# Altium PCB 24V_Drop_Regulator.PcbDoc
Units mm, origin at the board's own origin, x right, y up, seen from the top; angles counter-clockwise.
Board outline 43 x 20 mm, 2 copper layers (Top Layer, Bottom Layer); 14 components, 6 nets, 30 pads, 5 vias.
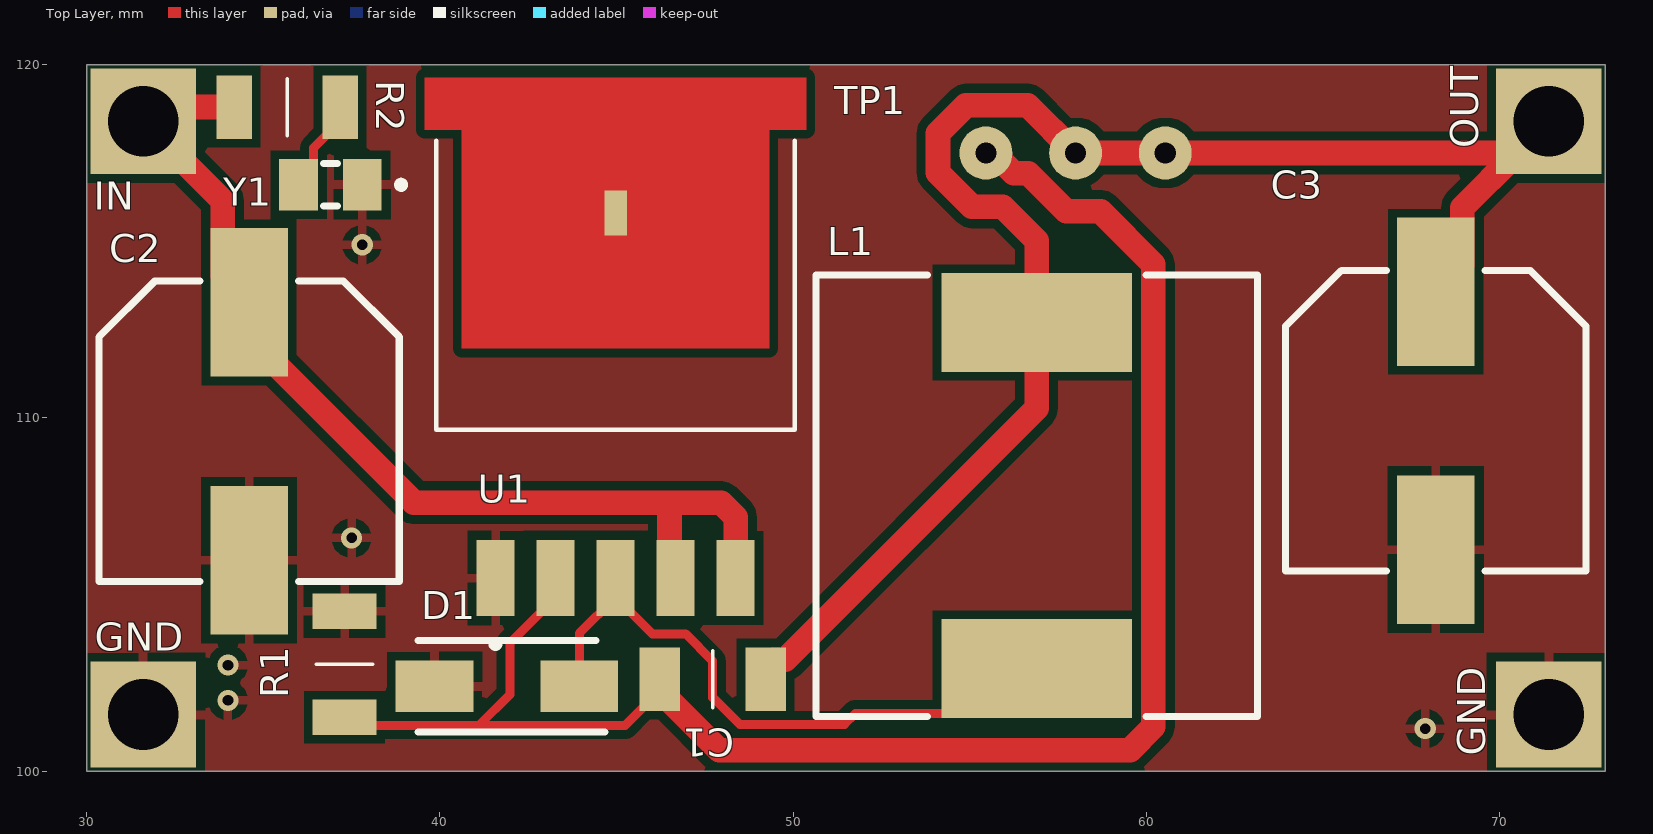
[diagram p0: Top Layer view]
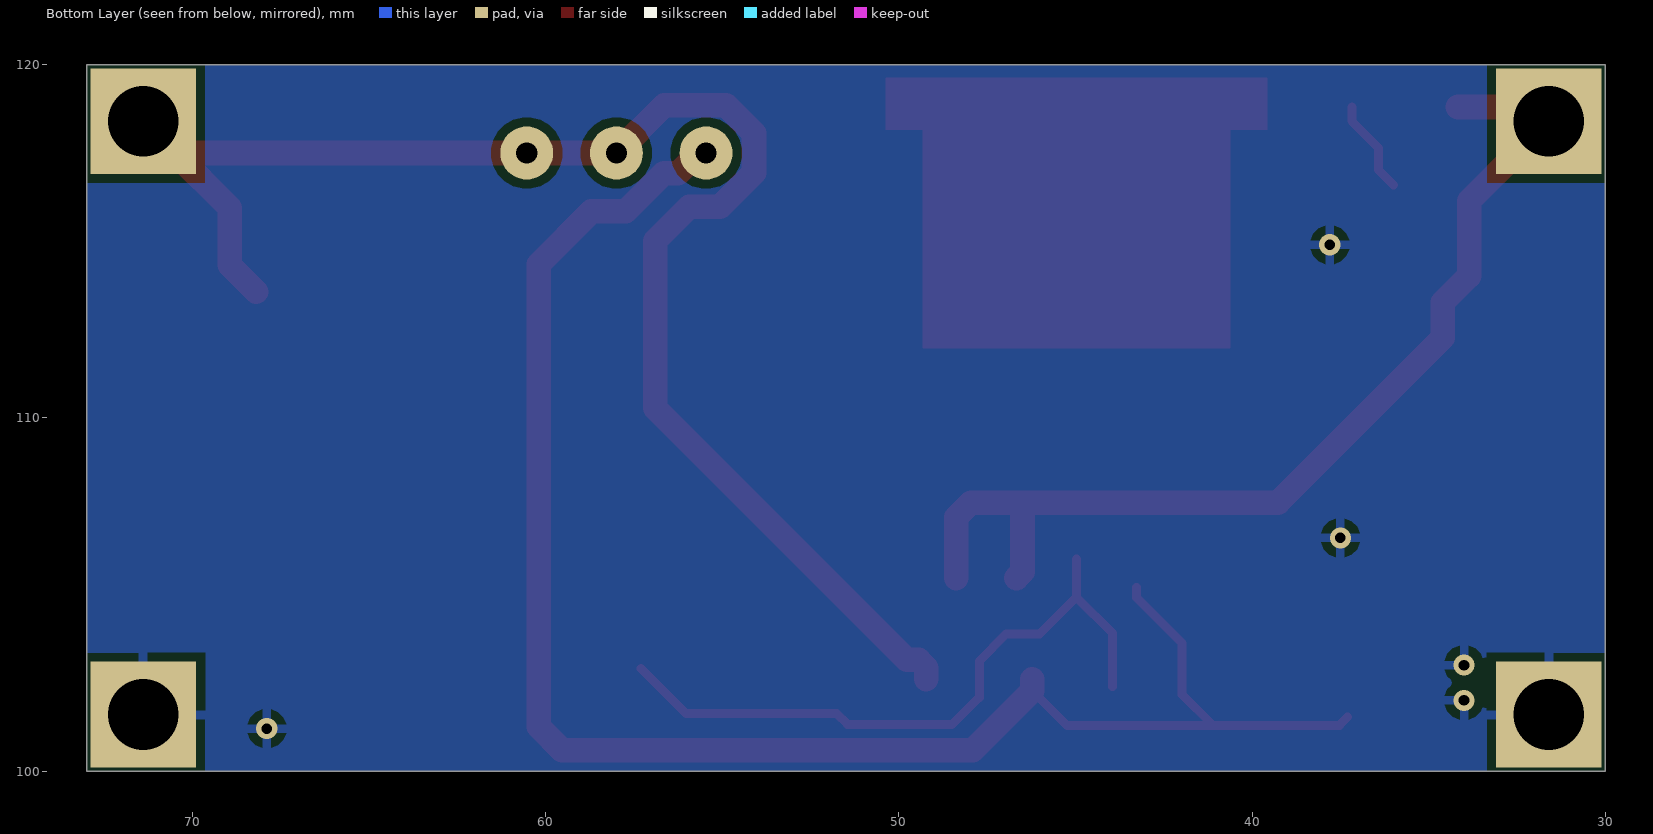
[diagram p1: Bottom Layer view, seen from below]
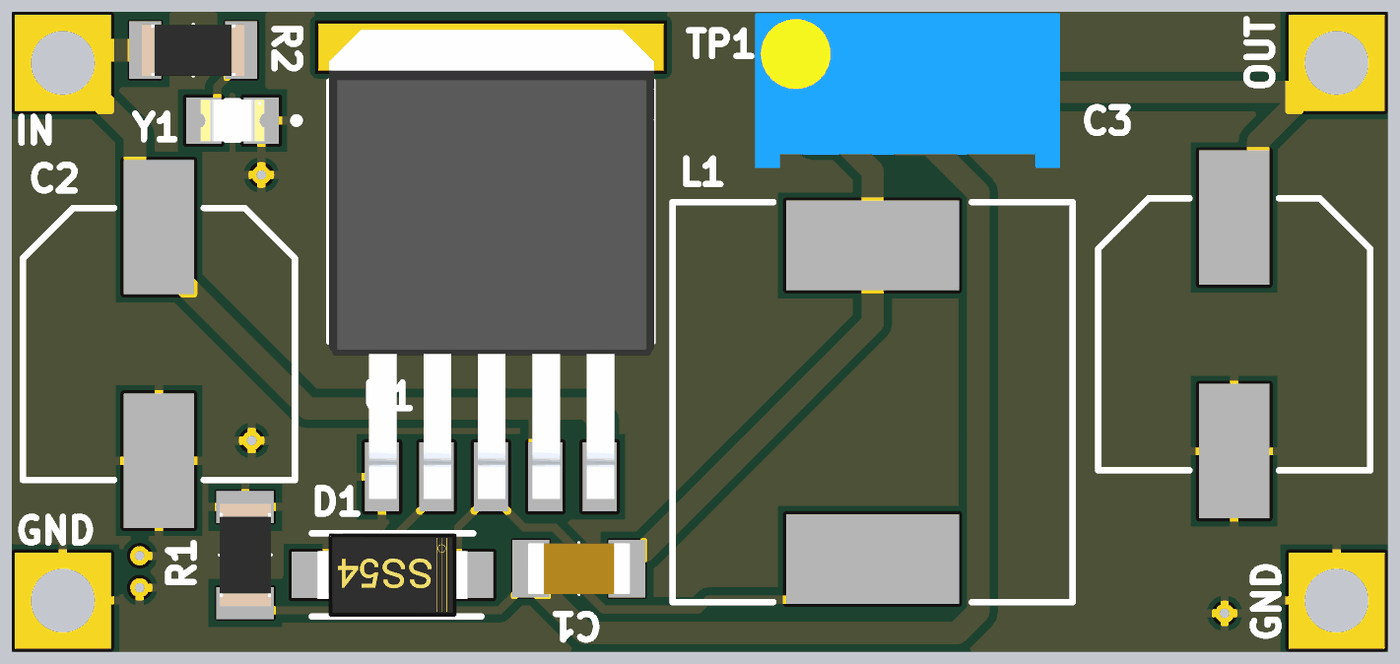
[diagram p2: 3D render of the assembled board from above, using the file's embedded part models]

## Layer stack, top to bottom
Top Solder: solder mask 0.0102, Solder Resist, Dk 3.5
Top Layer: signal copper 0.0356
Dielectric 1: dielectric 0.32, FR-4, Dk 4.8
Bottom Layer: signal copper 0.0356
Bottom Solder: solder mask 0.0102, Solder Resist, Dk 3.5

## Board outline
30,100 73,100 73,120 30,120

## Design rules (kind name [scope] priority, off if disabled: settings)
Clearance [All] p1: gap=0.254 ignorepadtopadclearanceinfootprint=FALSE except(0: Arc-Hole Track-Hole SMDPad-Hole THPad-Hole Via-Hole Fill-Hole Poly-Hole Region-Hole Text-Hole)
PolygonConnect [All] p1: connectstyle=Relief reliefconductorwidth=0.254 reliefentries=4 polygonreliefangle="90 Angle" airgapwidth=0.254
RoutingVias [All] p1: holewidth=0.3 width=0.6 viastyle="Through Hole" minholewidth=0.2 minwidth=0.2 maxholewidth=0.9 maxwidth=1.27
SolderMaskExpansion [All] p1: expansion=0.102 istentingtop=FALSE
Width [All] p1: maxlimit=1 minlimit=0.254 preferedwidth=0.254 minimp=50.000000 maximp=50.000000 favimp=50.000000
30 further rules are at their usual default settings.

## Classes and differential pairs
component class XL4005: C1 C2 C3 D1 GND IN L1 OUT R1 R2 TP1 U1 Y1

## Components (designator, comment, footprint, x,y, rotation, side; value= is the part's Value field where it differs from the comment)
C1 "33nF Capacitor" C1206 47.7,102.6 r0 top
C2 "470uF 50V Capacitor" "470uF 50V Capacitor" 34.6,109.8 r270 top
C3 "470uF 50V Capacitor" "470uF 50V Capacitor" 68.2,110.1 r270 top
D1 "SS54 Diode" SS54 41.9,102.4 r180 top
GND "GND PAD" "Edge Pads" 71.4,101.6 r0 top
GND "GND PAD" "Edge Pads" 31.6,101.6 r0 top
IN "INPUT PAD" "Edge Pads" 31.6,118.4 r0 top
L1 "33mH Inductor" "33mH 5A Inductor SMD" 56.9,107.8 r90 top
OUT "OUTPUT PAD" "Edge Pads" 71.4,118.4 r0 top
R1 "0.36k Resistor" "1206 Resistor" 37.4,103.1 r270 top
R2 "0.36k Resistor" "1206 Resistor" 35.6,118.9 r0 top
TP1 "Trimpot Potentiometer 10k" "Trimmer Potentiometer 3296" 55.46,117.5 r0 top
U1 "XL4005 IC" XL4005 45,115.6 r90 top
Y1 "0805 Led" "0805 Led" 36.9,116.6 r180 top

## Footprints (in the part's own frame and the unit in brackets; to place one, negate y for a bottom-side part, rotate by r counter-clockwise, add the part's x,y. Pads: shape width x height; smd on the part's side, far side on the other; paste and mask are expansions set on the pad)
"33mH 5A Inductor SMD" [mm]
  rect 2.8x5.4 smd: 1(-4.9,0) 2(4.9,0)
  silkscreen extent -6.25,-6.25 6.25,6.25, body extent -6.25,-6.25 6.25,6.25, height 8
"470uF 50V Capacitor" [mm]
  rect 4.2x2.2 smd: 1(-3.47,0) 2(3.83,0)
  silkscreen extent -4.07,-4.25 4.43,4.25, body extent -4.07,-4.25 4.43,4.25, height 10.5
"0805 Led" [mm]
  rect 1.1x1.45 smd: A(0.9,0) C(-0.9,0)
  silkscreen extent -2.1,-0.6 0.2,0.6, body extent -1,-0.65 1,0.65, height 0.9
"1206 Resistor" [mm]
  rect 1x1.8 smd mask+0.05: 1(-1.425,-0.1) 2(1.575,-0.1)
  silkscreen extent 0.08,-0.9 0.08,0.71, body extent -1.52,-0.9 1.68,0.71, height 0.55
C1206 [mm] "33nF Capacitor"
  rect 1.15x1.8 smd mask+0.05: 1(-1.475,0) 2(1.525,0)
  silkscreen extent 0.03,-0.8 0.03,0.81, body extent -1.57,-0.8 1.63,0.8, height 1
"Edge Pads" [mm]
  rect 3x3 hole 2: 1(0,0)
SS54 [mm] "Schottky Diode"
  rect 2.2x1.45 smd: 1(-2.05,0) 2(2.05,0)
  silkscreen extent -2.78,-1.3 2.52,1.3, body extent -2.35,-1.3 2.35,1.3, height 2
"Trimmer Potentiometer 3296" [mm] "10k"
  round 1.5 hole 0.6: 1(0,0) 2(2.54,0) 2(2.54,0) 3(5.08,0)
  body extent -2.23,-2.38 7.3,2.45, height 11.55
XL4005 [mm]
  rect 2.16x1.07 smd: 1(-10.135,3.425) 2(-10.135,1.725) 3(-10.135,0.025) 4(-10.135,-1.675) 5(-10.135,-3.375)
  rect 1.27x0.635 smd paste-2 mask+0: 3.1(0.2,0.025)
  Top Layer region: 4.035,-5.375 2.565,-5.375 2.565,-4.325 -3.635,-4.325 -3.635,4.375 2.565,4.375 2.565,5.425 4.035,5.425
  silkscreen extent -12.1,-5.05 2.25,5.11, body extent -10.82,-5.08 3.84,5.08, height 4.83

## Via types
v1: diameter 0.6, hole 0.3, Top Layer to Bottom Layer, 5 vias

## Nets (pads, with @x,y where several pads share a name; then routed paths per layer and width w, separated by ;. In a path a pad name is that pad's centre, name@x,y a point inside that pad or via, vN(x,y) a via of type N, cw(c..) or ccw(c..) an arc to the next point about the centre after c; other vN are vias at no path point)
GND: C2.2 C3.2 D1.2 GND.1 R1.1 U1.1 Y1.C
  other v1: 67.9,101.2 34,102 34,103 37.5,106.6 37.8,114.9
NetC1_1: C1.1 R1.2 TP1.1 U1.2 | length 48.6
  Top Layer w0.254: R1.2 37.531,101.294 41.108,101.294 ; U1.2@43.275,105.192 43.275,104.92 41.987,103.632 41.987,102.174 41.108,101.294 ; C1.1@46.225,102.275 45.244,101.294 41.108,101.294
  Top Layer w0.7: C1.1 46.225,102.275 47.912,100.588 59.542,100.588 60.204,101.25 60.204,114.35 58.706,115.849 57.737,115.849 56.656,116.93 56.247,116.93 55.676,117.5 TP1.1
NetD1_1: D1.1 L1.1 U1.3 | length 19.1
  Top Layer w0.254: D1.1 43.95,103.895 U1.3@44.975,104.92 ; U1.3@44.975,106.01 U1.3 U1.3@44.975,104.92 ; L1.1@57.3,102.9 56.027,101.627 51.764,101.627 51.456,101.319 48.492,101.319 47.725,102.086 47.725,103.114 46.958,103.881 46.014,103.881 U1.3@44.975,104.92
NetR2_2: R2.2 Y1.A | length 2.7
  Top Layer w0.254: Y1.A 36.423,117.023 36.423,117.648 37.175,118.4 R2.2
VCC_IN: C2.1 IN.1 R2.1 U1.4 U1.5 | length 29.9
  Top Layer w0.7: R2.1 32,118.8 IN.1 33.85,116.15 33.85,114.02 C2.1 34.6,112.27 39.27,107.6 46.5,107.6 ; U1.4 46.5,105.64 46.5,107.6 ; U1.5 48.375,107.19 47.965,107.6 46.5,107.6
VCC_OUT: C1.2 C3.1 L1.2 OUT.1 TP1.2 TP1.3 | length 43.9
  Top Layer w0.7: C1.2 49.225,102.925 49.45,103.15 49.775,103.15 56.9,110.275 L1.2 56.9,115.012 55.936,115.976 55.07,115.976 54.106,116.939 54.106,118.061 54.899,118.854 56.646,118.854 58,117.5 OUT.1@70.5,117.5 ; C3.1 68.95,114.32 68.95,115.95 OUT.1@70.5,117.5 ; OUT.1 OUT.1@70.5,117.5
pads on no net: U1.3.1

## Polygon pours and split planes (outlines as drawn)
GND on Top Layer "GND_L01_P000" (solid, pour order 0): 30,120 73,120 73,100 30,100
GND on Bottom Layer "GND_L02_P002" (solid, pour order 2): 30,120 73,120 73,100 30,100

## Silkscreen, mask and mechanical layers (free items; w line width, h text height)
Mechanical 1:
  the board outline again, w0.1